# Allegro board gumstix_expansion_v2r4 - Copy.brd
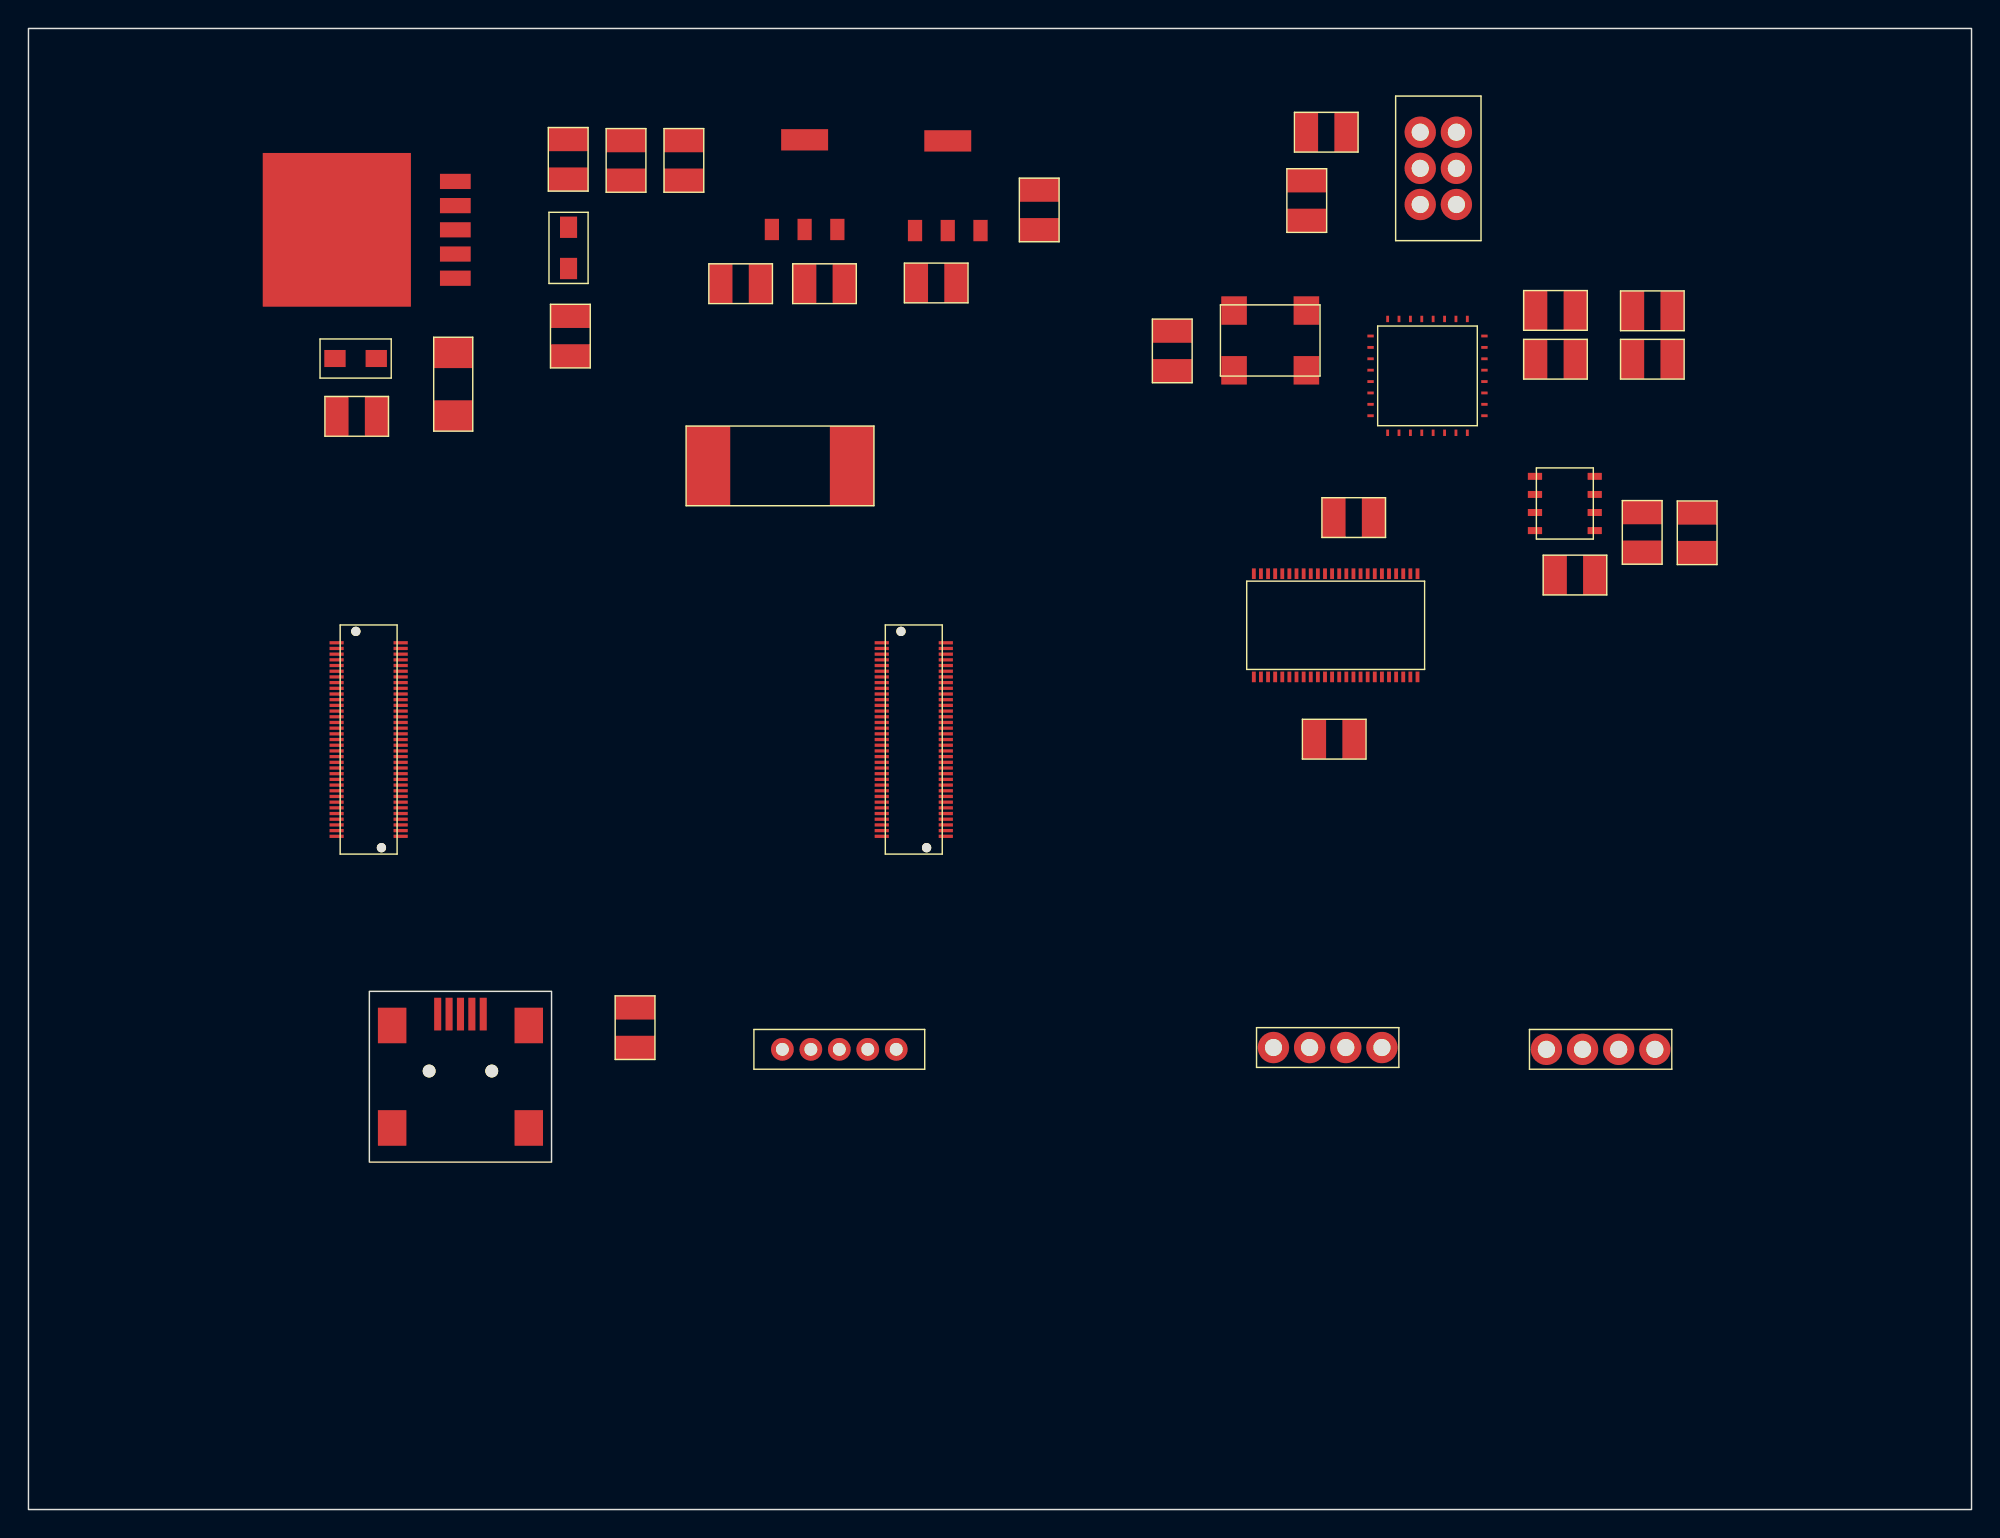
[diagram p0: board, top side]
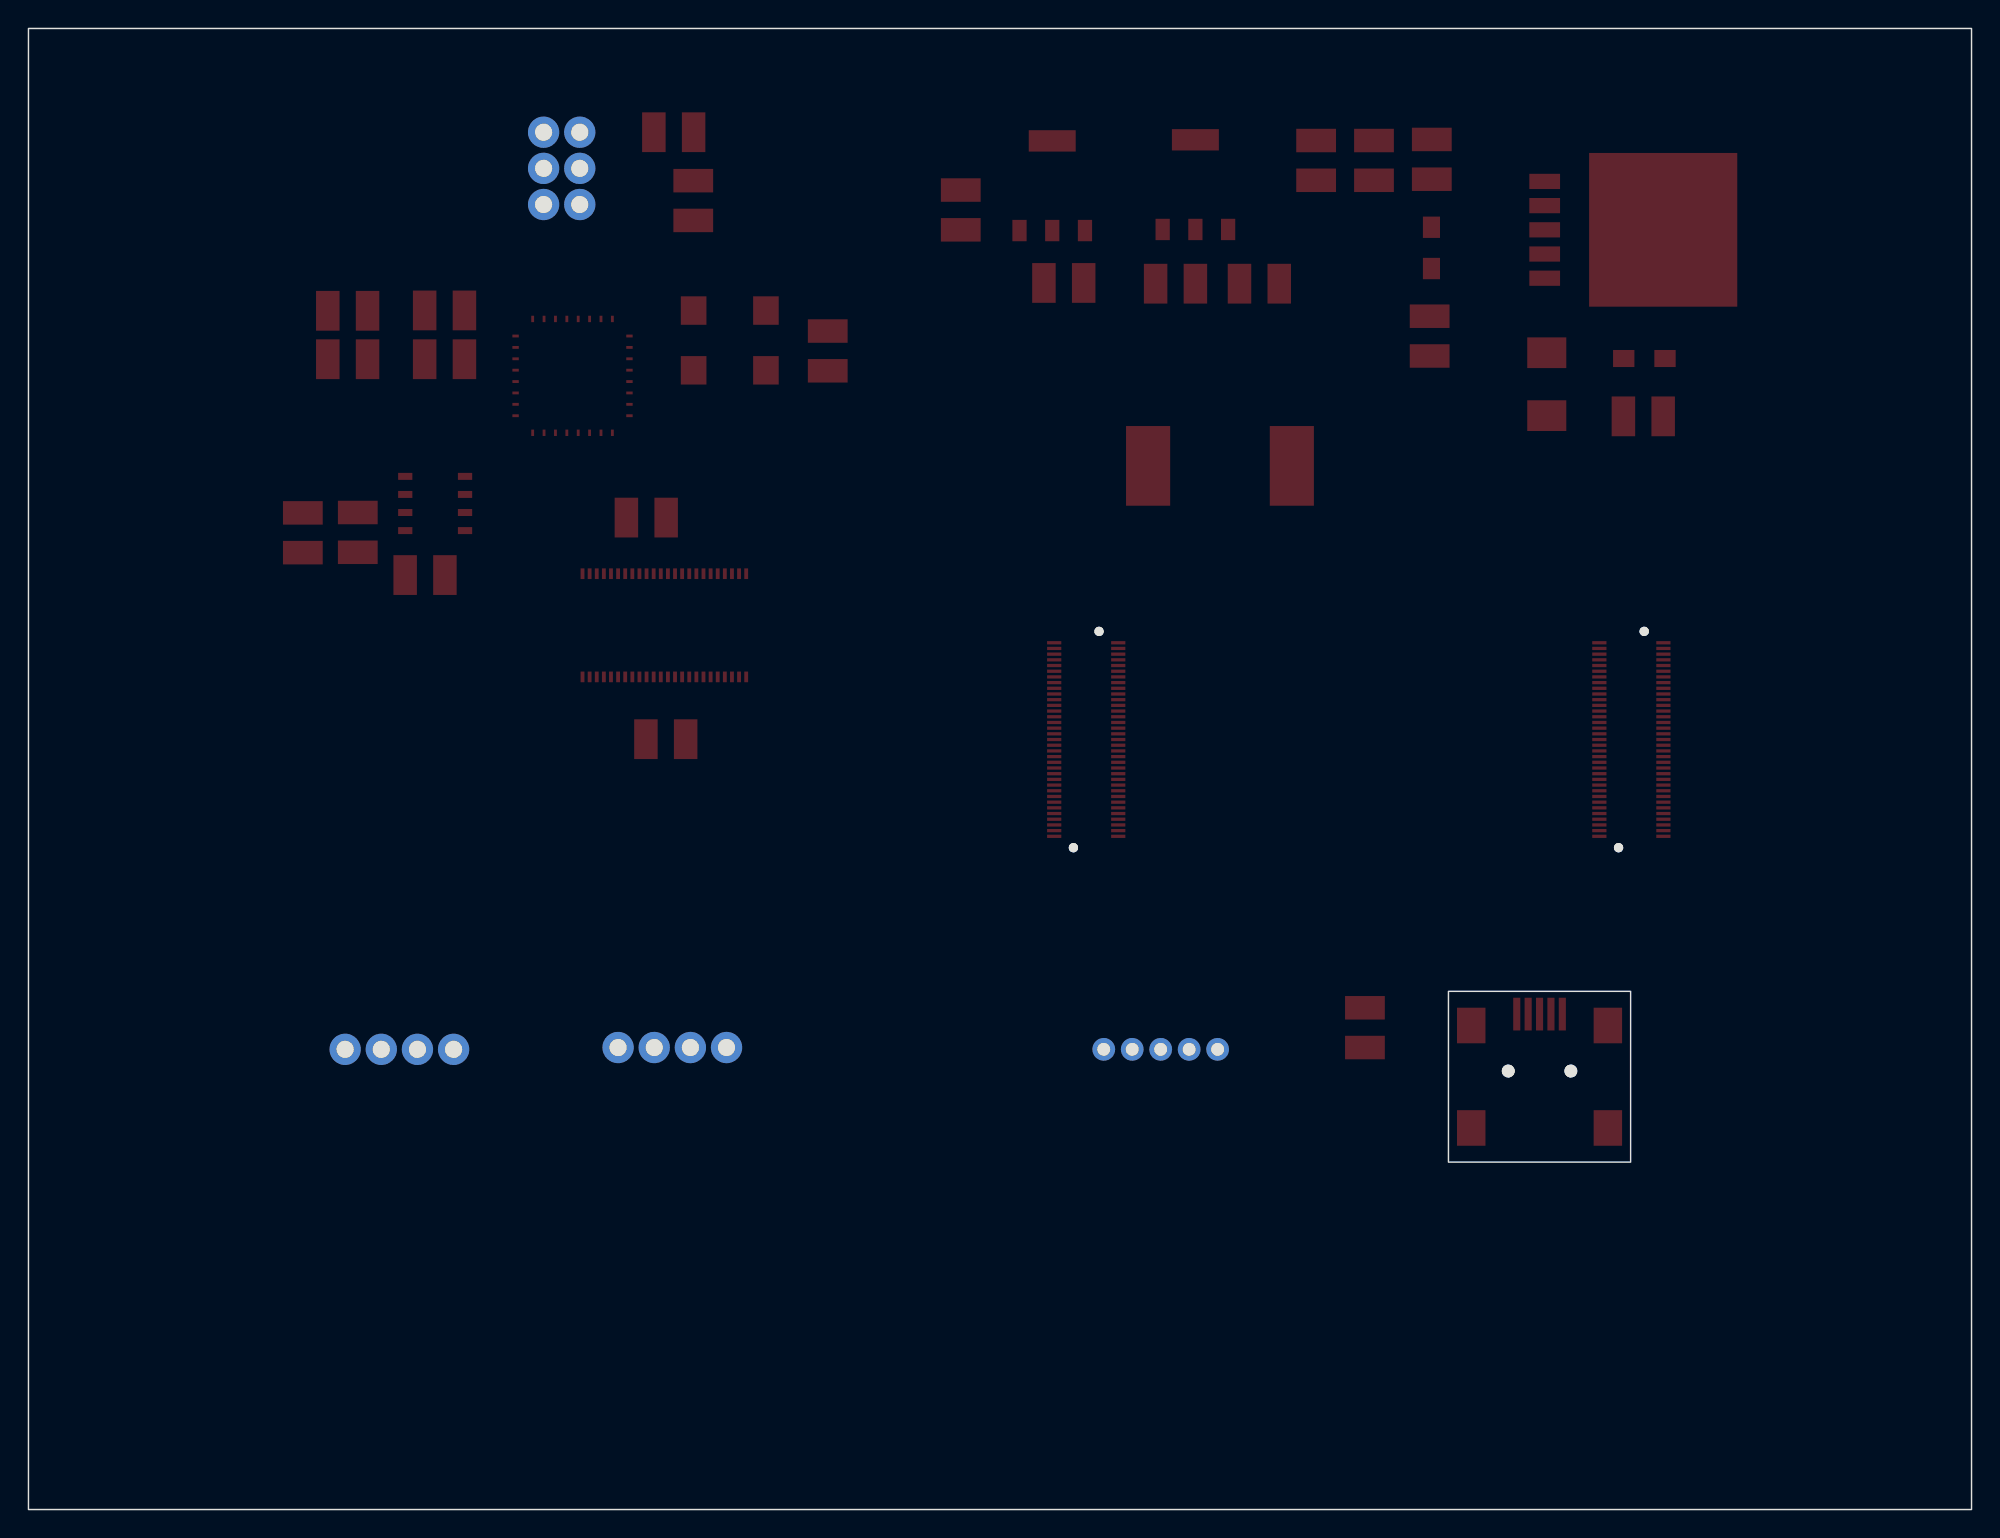
[diagram p1: board, bottom side, seen from below]

Outline 136.52 x 104.06 mm; copper layers: TOP, BOTTOM. Coordinates in mm from the lower left corner of the outline.
Outline path: rectangle 0,0 136.52,104.06

## Placement (name value [footprint] x y rotation side)
C1  1n  [1210]  42.62 33.86 90 top
C9  0.1u  [1210]  93.12 69.7 180 top
C10  0.1u  [1210]  91.74 54.13 0 top
C11  0.1u  [1210]  108.66 65.66 0 top
C12  0.1u  [1210]  89.81 91.97 90 top
C13  220u  [1210]  37.92 94.87 90 top
C14  100u  [1210]  41.99 94.79 90 top
C15  680u  [1210]  38.07 82.45 270 top
C16  100n  [1210]  46.05 94.79 270 top
C17  33u  [1210]  55.93 86.13 180 top
C18  0.47u  [1210]  50.04 86.13 0 top
C19  10u  [1210]  63.78 86.18 0 top
C20  10u  [1210]  71.02 91.31 270 top
C21  100n  [1210]  80.37 81.41 270 top
D1  -  [DIODE]  29.84 79.07 90 top
D2  DIODE SCHOTTKY  [SOD323F]  22.99 80.87 0 top
D3  DIODE SCHOTTKY  [SOD323F]  37.95 88.65 270 top
D4  F5E1/TO  [1210]  114.1 84.23 180 top
D5  F5E1/TO  [1210]  114.1 80.82 180 top
F1  FUSE  [1210]  23.06 76.81 180 top
J1  GUMSTIX_J4  [GUMSTIX]  62.2 54.1 180 top
J2  GUMSTIX_J1  [GUMSTIX]  23.9 54.1 0 top
J5  CON9  [MUSBA_TSMT]  30.35 30.81 90 top
J7  Background Header  [BACKGROUND_HEADER]  99.06 94.23 0 top
J8  4 HEADER  [HEADER_LINE_4]  110.46 32.33 270 top
J10  4 HEADER  [HEADER_LINE_4]  91.29 32.46 90 top
J11  CON5  [HEADER_LINE_5]  56.97 32.33 270 top
L1  33u  [COIL]  52.81 73.33 0 top
R3  60  [1210]  117.25 68.63 90 top
R4  60  [1210]  113.39 68.66 270 top
R5  10k  [1210]  91.19 96.77 0 top
R6  1k  [1210]  107.29 80.82 0 top
R7  1k  [1210]  107.29 84.25 0 top
U1  MC9S08DZ60  [MC9S08_LQFP32]  98.3 79.65 0 top
U2  SN74LVC16T245  [SN74DGG]  91.85 62.13 270 top
U3  TJA1040T  [TJA1040_SO8]  107.95 70.69 0 top
U5  -  [LM2592]  21.67 89.92 0 top
U6  LM3940  [SOT223]  54.53 96.24 0 top
U7  LM1117-1.8  [SOT223]  64.59 96.16 0 top
U8  -  [OSCILLATOR]  87.25 82.14 0 top

## Library data of the parts
C1 C9 C10 C13-C15 C17-C20 = C_elect_0
C11 C12 C16 C21 = C
D1 = DIODE
D2 D3 = DIODE SCHOTTKY
D4 D5 = F5E1/TO_0
F1 = FUSE
J1 = GUMSTIX_J4
J2 = GUMSTIX_J1
J5 = CON9
J7 = CONN MOD 6-6_J
J8 J10 = 4 HEADER
J11 = CON5
L1 = L
R3-R7 = R
U1 = MC9S08DZ60
U2 = SN74LVC16T245
U3 = TJA1040T
U5 = LM2592
U6 = LM3940
U7 = LM1117-1.8
U8 = OSCILLATOR

## Footprints (pads in the part's own frame, mm; a bottom-side part is the same pattern mirrored in y, then rotated)
1210
  rect 1.651x2.794 smd: 1(-1.397,0) 2(1.397,0)
BACKGROUND_HEADER
  round 2.2 hole 1.2 unplated: (-1.27,2.54) (-1.27,0) (-1.27,-2.54) (1.27,2.54) (1.27,0) (1.27,-2.54)
COIL
  rect 3.1x5.6 smd: 1(-5.05,0) 2(5.05,0)
DIODE
  rect 2.159x2.743 smd: 1(-2.21,0) 2(2.21,0)
GUMSTIX
  round 0.65 hole 0.65 unplated: (-0.9,7.6) (0.9,-7.6)
  rect 1x0.23 smd: 1(2.25,6.8) 2(2.25,6.4) 3(2.25,6) 4(2.25,5.6) 5(2.25,5.2) 6(2.25,4.8) 7(2.25,4.4) 8(2.25,4) 9(2.25,3.6) 10(2.25,3.2) 11(2.25,2.8) 12(2.25,2.4) 13(2.25,2) 14(2.25,1.6) 15(2.25,1.2) 16(2.25,0.8) 17(2.25,0.4) 18(2.25,0) 19(2.25,-0.4) 20(2.25,-0.8) 21(2.25,-1.2) 22(2.25,-1.6) 23(2.25,-2) 24(2.25,-2.4) 25(2.25,-2.8) 26(2.25,-3.2) 27(2.25,-3.6) 28(2.25,-4) 29(2.25,-4.4) 30(2.25,-4.8) 31(2.25,-5.2) 32(2.25,-5.6) 33(2.25,-6) 34(2.25,-6.4) 35(2.25,-6.8) 36(-2.25,-6.8) 37(-2.25,-6.4) 38(-2.25,-6) 39(-2.25,-5.6) 40(-2.25,-5.2) 41(-2.25,-4.8) 42(-2.25,-4.4) 43(-2.25,-4) 44(-2.25,-3.6) 45(-2.25,-3.2) 46(-2.25,-2.8) 47(-2.25,-2.4) 48(-2.25,-2) 49(-2.25,-1.6) 50(-2.25,-1.2) 51(-2.25,-0.8) 52(-2.25,-0.4) 53(-2.25,0) 54(-2.25,0.4) 55(-2.25,0.8) 56(-2.25,1.2) 57(-2.25,1.6) 58(-2.25,2) 59(-2.25,2.4) 60(-2.25,2.8) 61(-2.25,3.2) 62(-2.25,3.6) 63(-2.25,4) 64(-2.25,4.4) 65(-2.25,4.8) 66(-2.25,5.2) 67(-2.25,5.6) 68(-2.25,6) 69(-2.25,6.4) 70(-2.25,6.8)
HEADER_LINE_4
  round 2.2 hole 1.2 unplated: (0,3.81) (0,1.27) (0,-1.27) (0,-3.81)
HEADER_LINE_5
  round 1.6 hole 0.9 unplated: (0,4) (0,2) (0,0) (0,-2) (0,-4)
LM2592
  rect 2.16x1.07 smd: 1(8.325,-3.4) 2(8.325,-1.7) 3(8.325,0) 4(8.325,1.7) 5(8.325,3.4)
  rect 10.41x10.8 smd: 6(0,0)
MC9S08_LQFP32
  rect 0.45x0.2 smd: 1(-4,2.8) 2(-4,2) 3(-4,1.2) 4(-4,0.4) 5(-4,-0.4) 6(-4,-1.2) 7(-4,-2) 8(-4,-2.8) 17(4,-2.8) 18(4,-2) 19(4,-1.2) 20(4,-0.4) 21(4,0.4) 22(4,1.2) 23(4,2) 24(4,2.8)
  rect 0.2x0.45 smd: 9(-2.8,-4) 10(-2,-4) 11(-1.2,-4) 12(-0.4,-4) 13(0.4,-4) 14(1.2,-4) 15(2,-4) 16(2.8,-4) 25(2.8,4) 26(2,4) 27(1.2,4) 28(0.4,4) 29(-0.4,4) 30(-1.2,4) 31(-2,4) 32(-2.8,4)
MUSBA_TSMT
  round 0.9 hole 0.9 unplated: (0,2.2) (0,-2.2)
  rect 2.3x0.5 smd: 1(4,1.6) 2(4,0.8) 3(4,0) 4(4,-0.8) 5(4,-1.6)
  rect 2.5x2 smd: 6(-4,4.8) 7(-4,-4.8) 8(3.2,-4.8) 9(3.2,4.8)
OSCILLATOR
  rect 1.8x2 smd: 1(-2.54,2.1) 2(2.54,2.1) 3(2.54,-2.1) 4(-2.54,-2.1)
SN74DGG
  rect 0.75x0.27 smd: 1(-3.625,5.75) 2(-3.625,5.25) 3(-3.625,4.75) 4(-3.625,4.25) 5(-3.625,3.75) 6(-3.625,3.25) 7(-3.625,2.75) 8(-3.625,2.25) 9(-3.625,1.75) 10(-3.625,1.25) 11(-3.625,0.75) 12(-3.625,0.25) 13(-3.625,-0.25) 14(-3.625,-0.75) 15(-3.625,-1.25) 16(-3.625,-1.75) 17(-3.625,-2.25) 18(-3.625,-2.75) 19(-3.625,-3.25) 20(-3.625,-3.75) 21(-3.625,-4.25) 22(-3.625,-4.75) 23(-3.625,-5.25) 24(-3.625,-5.75) 25(3.625,-5.75) 26(3.625,-5.25) 27(3.625,-4.75) 28(3.625,-4.25) 29(3.625,-3.75) 30(3.625,-3.25) 31(3.625,-2.75) 32(3.625,-2.25) 33(3.625,-1.75) 34(3.625,-1.25) 35(3.625,-0.75) 36(3.625,-0.25) 37(3.625,0.25) 38(3.625,0.75) 39(3.625,1.25) 40(3.625,1.75) 41(3.625,2.25) 42(3.625,2.75) 43(3.625,3.25) 44(3.625,3.75) 45(3.625,4.25) 46(3.625,4.75) 47(3.625,5.25) 48(3.625,5.75)
SOD323F
  rect 1.5x1.2 smd: 1(-1.45,0) 2(1.45,0)
SOT223
  rect 1x1.5 smd: 1(-2.3,-6.3) 2(0,-6.3) 3(2.3,-6.3)
  rect 3.3x1.5 smd: 4(0,0)
TJA1040_SO8
  rect 1x0.49 smd: 1(-2.1,1.905) 2(-2.1,0.635) 3(-2.1,-0.635) 4(-2.1,-1.905) 5(2.1,-1.905) 6(2.1,-0.635) 7(2.1,0.635) 8(2.1,1.905)

## Nets
1.8V: C10.1(+) C20.1(+) U2.1(1DIR) U2.31(VCCA#31) U2.42(VCCA#42) U7.2(OUT) U7.4(VOUT)
3.3V: C17.1(+) C19.1(+) J1.1(VSYSTEM#1) J1.2(VSYSTEM#2) J2.66(VSYSTEM#66) J2.67(VSYSTEM#67) U6.3(OUT) U7.1(IN)
5.0V: C9.1(+) C21.2 J1.32(USBH_VBUS) R5.2 U1.2(VDD) U2.7(VCCB#7) U2.18(VCCB#18) U8.4(VS)
5V: C13.1(+) C14.1(+) C16.2 C18.1(+) L1.2 U5.4(FB) U6.1(IN)
12V: F1.2
GND: C1.2(-) C9.2(-) C10.2(-) C11.1 C12.1 C13.2(-) C14.2(-) C15.2(-) C16.1 C17.2(-) C18.2(-) C21.1 D2.1(ANODE) D3.1(ANODE) D4.1(CATHODE) D5.1(CATHODE) J1.3(GND#3) J1.33(GND#33) J2.56(GND#56) J2.70(GND#70) J5.5 U1.3(VSS) U2.4(GND#4) U2.10(GND#10) U2.15(GND#15) U2.21(GND#21) U2.24(2DIR) U2.25(2OEN) U2.28(GND#28) U2.34(GND#34) U2.39(GND#39) U2.45(GND#45) U2.48(1OEN) U3.2(GND) U5.3(GND2) U5.5(EN) U5.6(GND1) U6.2(GND1) U6.4(GND2) U8.2(GND)
5.0: U3.3(VCC)
BKGD: U1.21(BKGD/MS)
CANH: R3.2 U3.7(CANH)
CANL: R4.1 U3.6(CANL)
COMMON_SHIELD: C1.1(+) J5.6 J5.7 J5.8 J5.9
GPIO19: J1.36(GPIO19_MMC3_D1)
GPIO20: J1.39(GPIO20_MMC3_D2)
GPIO22: J1.37(GPIO22_MMC3_DAT6)
GPIO23: J1.38(GPIO23_MMC3_DAT5)
GPIO165_IR_RXD3_1.8V: J2.31(GPIO165_IR_RXD3) U2.35(2A2)
GPIO165_IR_RXD3_5V: U2.14(2B2)
GPIO166_IR_TXD3_1.8V: J2.26(GPIO166_IR_TXD3) U2.43(1A4)
GPIO166_IR_TXD3_5V: U2.6(1B4)
RESET: C12.2 R5.1 U1.6(RESETN)
RXCAN: U1.14(PTE7/RXD2/RXCAN) U3.4(RXD)
SPI_CLOCK_1.8V: J1.43(GPIO171_SPI1_CLK) U2.46(1A2)
SPI_CLOCK_5V: U1.10(PTE3/SPSCK) U2.3(1B2)
SPI_CS_1.8V: J1.42(GPIO175_SPI1_CS1) U2.44(1A3)
SPI_CS_5V: U1.9(PTE2/SSN) U2.5(1B3)
SPI_INTERRUPT_5V: U1.7(PTE0/TXD1)
SPI_MISO_1.8V: J1.45(GPIO173_SPI1_MISO) U2.36(2A1)
SPI_MISO_5V: U1.12(PTE5/SDA/MISO) U2.13(2B1)
SPI_MOSI_1.8V: J1.44(GPIO172_SPI1_MOSI) U2.47(1A1)
SPI_MOSI_5V: U1.11(PTE4/SCL/MOSI) U2.2(1B1)
STB: U1.15(PTD0/PID0/TPM2CH0) U3.8(STB)
TXCAN: U1.13(PTE6/TXD2/TXCAN) U3.1(TXD)
USB_OTG_DM: J2.37(USBOTG_DM) J5.2
USB_OTG_DP: J2.36(USBOTG_DP) J5.3
USB_OTG_ID: J2.46(USBOTG_ID) J5.4
USB_OTG_VBUS: J2.54(USBOTG_VBUS) J5.1
USBH_DM: J1.35(USBH_DM)
USBH_DP: J1.34(USBH_DP)
N56753: C11.2 R3.1 R4.2 U3.5(SPLIT)
N57412: U1.4(PTG0/EXTAL) U8.3(OUT)
N58739: C15.1(+) D1.2(K) U5.1(IN)
N58762: D1.1(A) D2.2(CATHODE) F1.1
N58835: D3.2(CATHODE) L1.1 U5.2(OUT)
N59595: C19.2(-) C20.2(-) U7.3(GND)
N63291: R6.1 U1.22(PTB0/PIB0/ADP8)
N63295: R7.1 U1.24(PTB1/PIB1/ADP9)
N63299: D4.2(ANODE) R7.2
N63350: D5.2(ANODE) R6.2

Pads without a net: J1 4 5 6 7 8 9 10 11 12 13 14 15 16 17 18 19 20 21 22 23 24 25 26 27 28 29 30 31 40 41 46 47 48 49 50 51 52 53 54 55 56 57 58 59 60 61 62 63 64 65 66 67 68 69 70; J2 1 2 3 4 5 6 7 8 9 10 11 12 13 14 15 16 17 18 19 20 21 22 23 24 25 27 28 29 30 32 33 34 35 38 39 40 41 42 43 44 45 47 48 49 50 51 52 53 55 57 58 59 60 61 62 63 64 65 68 69; U1 1 5 8 16 17 18 19 20 23 25 26 27 28 29 30 31 32; U2 8 9 11 12 16 17 19 20 22 23 26 27 29 30 32 33 37 38 40 41; U8 1
